# Altium PCB 模拟触发器.PCBDOC
Units mm, origin at the board's own origin, x right, y up, seen from the top; angles counter-clockwise.
Board outline 190.25 x 91.44 mm, 2 copper layers (Top Layer, Bottom Layer); 45 components, 36 nets, 174 pads, 5 vias.
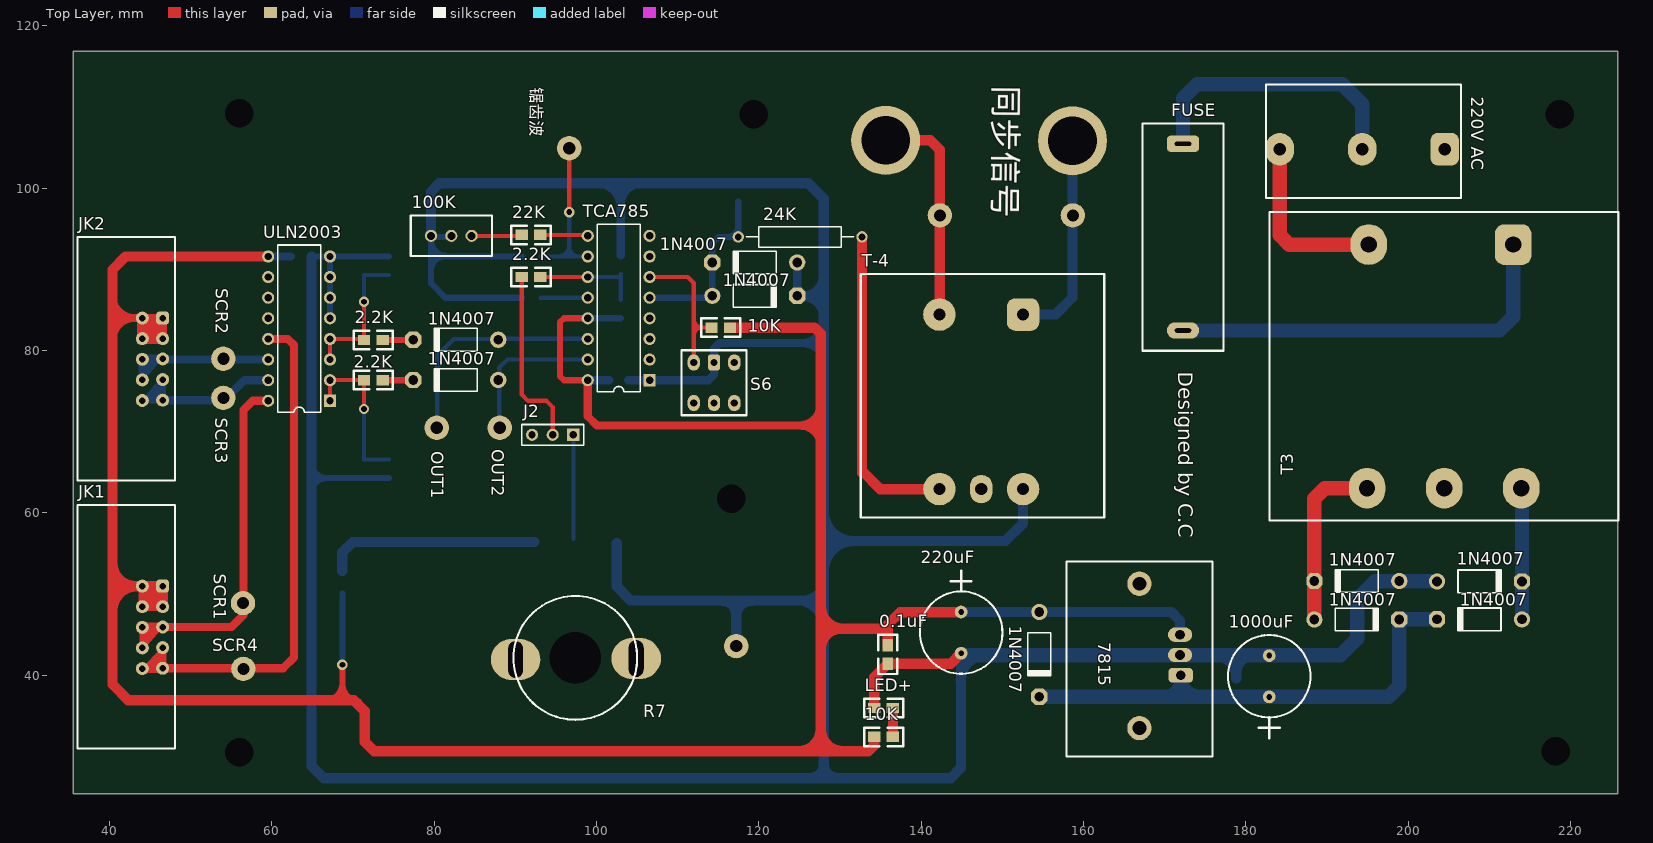
[diagram p0: Top Layer view]
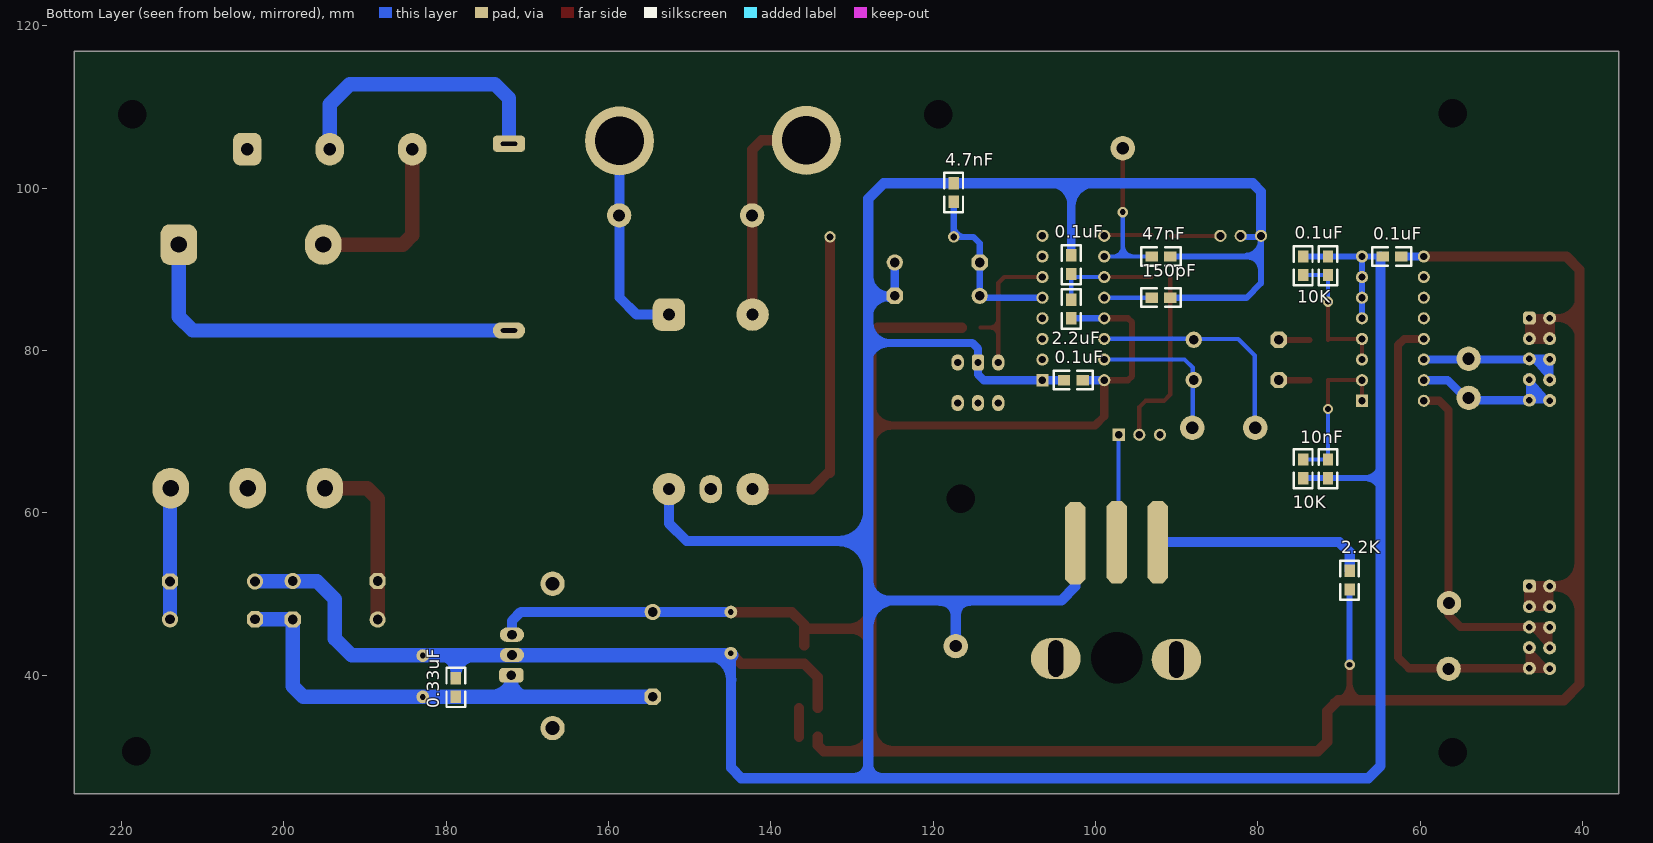
[diagram p1: Bottom Layer view, seen from below]

## Layer stack, top to bottom
Top Solder: solder mask 0.0102, Solder Resist, Dk 3.5
Top Layer: signal copper 0.0356
Dielectric1: dielectric 0.32, FR-4, Dk 4.8
Bottom Layer: signal copper 0.0356
Bottom Solder: solder mask 0.0102, Solder Resist, Dk 3.5

## Board outline
35.56,25.4 225.806,25.4 225.806,116.84 35.56,116.84

## Design rules (kind name [scope] priority, off if disabled: settings)
Clearance [All] p1: gap=0.254 ignorepadtopadclearanceinfootprint=FALSE except(0: Arc-Hole Track-Hole SMDPad-Hole THPad-Hole Via-Hole Fill-Hole Poly-Hole Region-Hole Text-Hole)
FabricationTestPointUsage TestPointUsage [All] p1: valid=0 allowmultiple=FALSE
FabricationTestpoint Testpoint [All] p1: side=3 testpointundercomponent=TRUE minsize=1.016 maxsize=2.54 preferedsize=1.524 minholesize=0 maxholesize=1.016 preferedholesize=0.813 testpointgrid=0.025 allowsidetop=TRUE allowsidebottom=TRUE usegrid=TRUE gridtolerance=0
Height [All] p1: minheight=0 maxheight=254 prefheight=12.7
HoleSize [All] p1: absolutevalues=TRUE maxlimit=25.4 minlimit=0.025 maxpercent=80.000 minpercent=20.000
PolygonConnect [All] p1: connectstyle=Relief reliefconductorwidth=0.254 reliefentries=4 polygonreliefangle="90 Angle" airgapwidth=0.254
RoutingVias [All] p1: holewidth=0.711 width=1.27 viastyle="Through Hole" minholewidth=0.711 minwidth=1.27 maxholewidth=0.711 maxwidth=1.27
SolderMaskExpansion [All] p1: expansion=0.102 istentingtop=FALSE
Width [All] p1: maxlimit=2.54 minlimit=0.254 preferedwidth=0.254 minimp=50.000000 maximp=50.000000 favimp=50.000000
26 further rules are at their usual default settings.

## Classes and differential pairs
component class Sheet3: 0.1uF 1N4007 2.2K 2.2uF 4.7nF 10K 22K 24K 47nF 100K 150pF 220uF J2 LED+ S1 T1 TCA785 ULN2003

## Components (designator, comment, footprint, x,y, rotation, side; value= is the part's Value field where it differs from the comment)
0.1uF "Cap" 0805 62.357,91.567 r0 bottom (schematic designator C1)
0.1uF "Cap" 0805 74.422,89.281 r90 bottom (schematic designator C6)
0.1uF "Cap" 0805 102.997,91.694 r270 bottom (schematic designator C3)
0.1uF "Cap" 0805 103.886,76.327 r180 bottom (schematic designator C6)
0.1uF "Cap" 0805 135.89,41.402 r90 top (schematic designator C9)
0.33uF "Cap" 0805 178.816,39.624 r270 bottom (schematic designator C12)
1N4007 "Diode 1N4001" DO-41 154.559,42.545 r270 top (schematic designator D12)
1N4007 "Diode 1N4004" DO-41 208.788,51.537 r0 top (schematic designator D8)
1N4007 "Diode 1N4004" DO-41 208.788,46.863 r180 top (schematic designator D7)
1N4007 "Diode 1N4004" DO-41 193.675,51.587 r180 top (schematic designator D8)
1N4007 "Diode 1N4004" DO-41 193.675,46.838 r0 top (schematic designator D8)
1N4007 "Diode 1N4004" DO-41 119.507,86.716 r0 top (schematic designator D8)
1N4007 "Diode 1N4004" DO-41 119.507,90.83 r180 top (schematic designator D8)
1N4007 "Diode 1N4004" DO-41 82.677,81.305 r180 top (schematic designator D8)
1N4007 "Diode 1N4004" DO-41 82.677,76.352 r180 top (schematic designator D8)
2.2K "Res1" 0805 68.707,52.832 r270 bottom (schematic designator R8)
2.2K "Res1" 0805 90.805,89.027 r0 top (schematic designator R4)
2.2K "Res1" 0805 71.374,76.327 r0 top (schematic designator R2)
2.2K "Res1" 0805 71.374,81.28 r0 top (schematic designator R3)
2.2uF "Cap" 0805 102.997,86.233 r270 bottom (schematic designator C2)
4.7nF "Cap" 0805 117.475,98.298 r90 bottom (schematic designator C1)
10K "Res1" 0805 74.422,64.262 r90 bottom (schematic designator R3)
10K "Res1" 0805 71.374,89.281 r90 bottom (schematic designator R1)
10K "Res1" 0805 114.173,82.804 r0 top (schematic designator R9)
10K "Res1" 0805 136.525,32.385 r180 top (schematic designator R10)
10nF "Cap" 0805 71.374,64.262 r90 bottom (schematic designator C6)
22K "Res1" 0805 90.805,94.234 r0 top (schematic designator R5)
24K "Res1" AXIAL-0.6 125.095,93.98 r0 top (schematic designator R1)
47nF "Cap" 0805 90.805,91.567 r0 bottom (schematic designator C4)
100K "RPot" 滑动变阻器 79.629,94.107 r0 top (schematic designator R6)
150pF "Cap" 0805 90.805,86.487 r0 bottom (schematic designator C5)
220uF "Cap Pol1" RB.2/.4 144.93,47.775 r90 top (schematic designator C10)
"220V AC" "Comment" KF950 206.502,112.776 r180 top
1000uF "Cap Pol1" RB.2/.4 182.88,37.315 r270 top (schematic designator C10)
7815 "L7815CV" SANRE-78XX-2 175.895,29.972 r90 top (schematic designator U13)
FUSE "Comment" FUSE-1 167.259,107.95 r270 top
J2 "CON3" HDR1X3 97.155,69.596 r180 top
JK1 "Comment" JIEKOU-5L53 36.068,60.96 r270 top
JK2 "Comment" JIEKOU-5L53 36.068,93.98 r270 top
LED+ "LED0" 0805 136.525,35.941 r180 top (schematic designator D10)
S6 "SW-SPST" KAIGUAN-1 118.491,80.01 r180 top
T3 "Trans Eq" T5-5W 225.933,97.028 r180 top
T-4 "Comment" T5-1W 162.56,89.408 r180 top
TCA785 "TCA785" DIP-16 102.743,85.217 r90 top (schematic designator U1)
ULN2003 "ULN2003A" DIP-16 63.373,82.677 r90 top (schematic designator U2)

## Footprints (in the part's own frame and the unit in brackets; to place one, negate y for a bottom-side part, rotate by r counter-clockwise, add the part's x,y. Pads: shape width x height; smd on the part's side, far side on the other; paste and mask are expansions set on the pad)
0805 [mil]
  rect 60x50 smd: 1(0,0) 2(90,0)
  silkscreen extent -50,-45 140,45
AXIAL-0.6 [mm] "Variable Resistor; 2 Leads"
  round 1.4 hole 0.85: 1(-7.62,0) 2(7.62,0)
  silkscreen extent -6.6,-1.27 6.6,1.27
DIP-16 [mm] "DIP; 16 Leads; Row Spacing 7.62 mm; Pitch 2.54 mm"
  rect 1.5x1.5 hole 0.9: 1(-8.89,-3.81)
  round 1.5 hole 0.9: 2(-6.35,-3.81) 3(-3.81,-3.81) 4(-1.27,-3.81) 5(1.27,-3.81) 6(3.81,-3.81) 7(6.35,-3.81) 8(8.89,-3.81) 9(8.89,3.81) 10(6.35,3.81) 11(3.81,3.81) 12(1.27,3.81) 13(-1.27,3.81) 14(-3.81,3.81) 15(-6.35,3.81) 16(-8.89,3.81)
  silkscreen extent -10.3,-2.65 10.3,2.65
DO-41 [mm] "Diode, Axial; Body 5.2 x 2.7 mm (LxDia. max), Lead Dia. 0.86 mm (max)"
  round 2 hole 1.2: 1(-5.23,0)
  oct 2x2 hole 1.2: 2(5.23,0)
  silkscreen extent -2.65,-1.4 2.75,1.4
FUSE-1 [mm]
  rrect50% 2x4 hole 0.5 slot 2 at 90 deg: 1(2.5,5)
  oval 2x4 hole 0.5 slot 2 at 90 deg: 2(25.5,5)
  silkscreen extent 0,0 28,10
HDR1X3 [mm] "Connector; Header; 3 Position"
  rect 1.5x1.5 hole 0.9: 1(0,0)
  round 1.5 hole 0.9: 2(2.54,0) 3(5.08,0)
  silkscreen extent -1.27,-1.27 6.35,1.27
JIEKOU-5L53 [mm]
  rrect50% 1.6x1.6 hole 0.8: 1(10,10.5)
  round 1.6 hole 0.8: 2(10,8) 3(12.54,10.5) 4(12.54,8) 5(15.04,10.5) 6(15.08,8) 7(17.58,10.5) 8(17.62,8) 9(20.12,10.5) 10(20.16,8)
  silkscreen extent 0,0 30,12
KAIGUAN-1 [mm]
  rrect50% 1.524x2 hole 0.9: 1(4,1.5)
  oval 1.5x2 hole 0.9: 2(6.5,1.5)
  oval 1.524x2 hole 0.9: ""(1.5,6.5) ""(1.5,1.5) ""(4,6.5) ""(6.5,6.5)
  silkscreen extent 0,0 8,8
KF950 [mm]
  rrect50% 3.5x4 hole 1.5: 1(2,8)
  oval 3.5x4 hole 1.5: 2(12.16,8) 3(22.32,8)
  silkscreen extent 0,0 24,14
RB.2/.4 [mil]
  round 62 hole 28: 1(0,0) 2(-200,0)
  silkscreen extent -300,-200 200,200
SANRE-78XX-2 [mm]
  rrect50% 1.778x3 hole 1.2: 1(10,3.92)
  oval 1.778x3 hole 1.2: 2(12.5,4) 3(15,4)
  round 3 hole 1.7: ""(3.5,9) ""(21.28,9)
  silkscreen extent 0,0 24,18
T5-1W [mm]
  rrect50% 4x4 hole 1.5: 1(10,5)
  round 4 hole 1.5: 2(20.305,5) 3(20.305,26.5) 4(10,26.5)
  oval 2.794x3.5 hole 1.5: ""(15.152,26.5)
  silkscreen extent 0,0 30,30
T5-5W [mm]
  rrect50% 4.5x5 hole 2: 1(13,4)
  oval 4.5x5 hole 2: 2(30.78,4) 3(31,34) 4(12,34) ""(21.5,34)
  silkscreen extent 0,0 43,38
滑动变阻器 [mm]
  round 1.5 hole 1: 1(0,0) 2(2.5,0) 3(5,0)
  silkscreen extent -2.5,-2.5 7.5,2.5

## Part data
0.1uF 0.1uF 0.1uF 0.1uF 0.1uF 0.33uF 2.2uF 4.7nF 10nF 47nF 150pF: "Capacitor"
1N4007 1N4007 1N4007 1N4007 1N4007 1N4007 1N4007 1N4007 1N4007: "1 Amp General Purpose Rectifier"
2.2K 2.2K 2.2K 2.2K 10K 10K 10K 10K 22K 24K: "Resistor"
100K: "Potentiometer"
220uF 1000uF: "Polarized Capacitor (Radial)"
7815: "Positive Voltage Regulator"
LED+: "Typical INFRARED GaAs LED"
S6: "Single-Pole, Single-Throw Switch"
T3: "Transformer (Equivalent Circuit Model)"
ULN2003: "High-Voltage, High-Current Darlington Array"

## Free pads (board coordinates)
  oct 2.54x10.16 smd far side: 1(92.329,56.388) 2(97.409,56.388) 3(102.489,56.261)
  round 3 hole 1.5: 5(54.051,74.143) 5(54.051,78.969) 5(56.464,48.87) 5(56.515,40.767) 5(80.34,70.46) 5(88.087,70.46) 5(96.647,104.902) 5(117.221,43.561) 5(142.316,96.622) 5(158.699,96.622)
  round 0 hole 3.5: 10(56.007,30.48) 10(56.007,109.22) 10(116.586,61.722) 10(119.38,109.093) 10(218.186,30.607) 10(218.694,109.093)
  round 8.5 hole 6: 11(135.636,105.867) 12(158.648,105.816)
  round 0 hole 6.35: " "(97.407,42.115)
  oval 6.096x5.08 hole 1.8 slot 4.5 at 90 deg: ""(90.043,41.91) ""(104.902,42.037)

## Via types
v1: diameter 1.27, hole 0.711, Top Layer to Bottom Layer, 5 vias

## Nets (pads, with @x,y where several pads share a name; then routed paths per layer and width w, separated by ;. In a path a pad name is that pad's centre, name@x,y a point inside that pad or via, vN(x,y) a via of type N, cw(c..) or ccw(c..) an arc to the next point about the centre after c; other vN are vias at no path point)
+15V: 0.1uF.1@62.357,91.567 0.1uF.2@101.6,76.327 0.1uF.2@135.89,43.688 1N4007.1@154.559,47.775 2.2K.2@68.707,50.546 2.2uF.2 10K.2@116.459,82.804 10K.2@134.239,32.385 220uF.1 7815.3 JK1.1 JK1.2 JK1.3 JK1.4 JK2.1 JK2.2 JK2.3 JK2.4 TCA785.13 TCA785.16 ULN2003.9 | length 410.2
  Top Layer w0.762: 66.552,36.767 ccw(c66.425,39.053) 68.707,38.862 ; 68.707,37.338 v1(68.707,41.275) ; 68.707,38.735 ccw(c70.929,38.925) 70.739,36.703 ; TCA785.16 96.012,76.327 95.504,76.835 95.504,83.439 96.012,83.947 v1(98.933,83.947)
  Top Layer w1.016: 40.386,81.026 cw(c43.07,81.297) 40.386,81.567 cw(c43.07,81.297) 42.799,83.98 ; 40.386,86.995 ccw(c43.1,86.694) 40.386,86.393 ccw(c43.1,86.694) 42.799,83.98 ; 40.419,83.98 42.799,83.98 ; JK2.2 42.799,83.98 ; TCA785.16 98.933,71.882 100.076,70.739 125.095,70.739 ; 127.635,68.199 ccw(c125.095,68.199) 125.095,70.739 ; 127.635,70.739 125.095,70.739 ; 127.635,73.279 cw(c124.968,73.406) 125.095,70.739
  Top Layer w1.27: 40.386,47.879 cw(c43.451,47.895) JK1.2@43.434,50.96 ; 40.386,53.721 ccw(c43.227,53.801) JK1.2@43.307,50.96 ; 40.419,50.96 JK1.2 ; ULN2003.9 42.037,91.567 40.386,89.916 40.386,38.862 42.332,36.916 70.104,36.916 71.468,35.552 71.468,31.783 72.644,30.607 133.35,30.607 ; 10K.2@116.459,82.804 126.873,82.804 127.635,82.042 127.635,30.607 ; 124.841,30.607 ccw(c124.841,33.401) 127.635,33.397 ; 127.635,43.18 cw(c130.175,43.18) 127.635,43.184 cw(c130.175,43.18) 130.175,45.72 ; 127.635,45.72 135.89,45.72 ; 127.635,48.514 ccw(c130.429,48.514) 130.429,45.72 ; 130.429,30.607 cw(c130.429,33.401) 127.635,33.398 ; 133.477,30.607 134.239,31.369 10K.2@134.239,32.385 ; 0.1uF.2@135.89,43.688 135.89,46.228 137.414,47.752 220uF.1@144.907,47.752 ; 127.635,33.398 ccw(c124.841,33.401) 127.635,33.401 ccw(c130.429,33.401) 127.635,33.398
  Bottom Layer w0.762: v1@68.707,41.529 2.2K.2@68.707,50.038 ; v1(98.933,83.947) 2.2uF.2
  Bottom Layer w1.016: ULN2003.9 0.1uF.1@62.357,91.567 ; TCA785.16 0.1uF.2@101.6,76.327
  Bottom Layer w1.27: 220uF.1 170.792,47.775 171.895,46.672 7815.3
CON3-1: J2.1 pad.2 | length 12.8
  Bottom Layer w0.508: pad.2@97.155,56.769 J2.1
CON3-2: 2.2K.1@90.805,89.027 J2.2 | length 22.3
  Top Layer w0.508: 2.2K.1@90.805,89.027 90.805,74.549 91.567,73.787 93.853,73.787 94.615,73.025 J2.2
CON3-3: J2.3
GND: 0.1uF.1@102.997,91.694 0.1uF.1@103.886,76.327 0.1uF.1@135.89,41.402 0.1uF.2@64.643,91.567 0.1uF.2@74.422,91.567 0.33uF.1 1N4007.1@124.737,90.83 1N4007.1@198.905,51.587 1N4007.1@203.558,51.537 1N4007.2@124.737,86.716 4.7nF.2 10K.1@74.422,64.262 10K.2@71.374,91.567 10nF.1 47nF.1 100K.1 100K.2 150pF.1 220uF.2 1000uF.2 7815.2 LED+.2 pad.3 pad.5@117.221,43.561 S6.1 T-4.4 TCA785.1 ULN2003.5 ULN2003.6 ULN2003.7 ULN2003.8 | length 615.6
  Top Layer w1.27: LED+.2 134.239,39.751 135.89,41.402 143.637,41.402 220uF.2@144.907,42.672
  Bottom Layer w0.254: TCA785.1@106.426,76.454 TCA785.1
  Bottom Layer w0.762: 0.1uF.2@64.643,91.567 0.1uF.2@74.422,91.567 ; 64.897,62.484 cw(c66.739,62.42) 66.675,64.262 cw(c66.739,62.42) 66.737,64.263 ; 64.897,64.262 10K.1@74.422,64.262 ; 64.897,66.167 ccw(c66.802,66.167) 66.737,64.263 ; ULN2003.5 ULN2003.8 ; 79.629,90.043 cw(c81.3,89.896) 81.153,91.567 ; 100K.1@79.629,93.472 ccw(c81.49,93.515) 81.334,91.66 ; 100K.1@79.629,93.98 100K.2@82.002,93.98 ; 100K.1 79.629,88.265 81.407,86.487 150pF.1 ; 79.756,91.567 47nF.1 ; 66.737,64.263 ccw(c66.802,66.167) 66.802,64.262 ccw(c66.739,62.42) 66.737,64.263
  Bottom Layer w1.016: 99.949,100.584 cw(c100.013,97.599) 100.076,100.584 cw(c100.013,97.599) 102.987,97.852 ; 0.1uF.1@102.997,91.694 102.997,97.663 ; 102.997,100.584 102.997,97.663 ; 0.1uF.1@103.886,76.327 113.792,76.327 114.491,77.026 114.491,80.201 115.189,80.899 125.222,80.899 ; 105.443,100.584 ccw(c105.68,97.901) 102.997,98.138 ccw(c105.68,97.901) 102.987,97.852 ; 1N4007.1@124.737,90.805 124.737,86.614 128.016,86.614 ; 1N4007.2@125.476,86.614 cw(c125.285,83.883) 128.016,84.074 ; 125.603,80.899 cw(c125.412,78.168) 128.016,79.013 cw(c125.412,78.168) 128.143,78.359 ; 127.889,83.439 cw(c125.286,83.502) 125.349,80.899 128.016,80.899 ; 102.987,97.852 cw(c100.013,97.599) 102.997,97.663 ; 102.987,97.852 ccw(c105.68,97.901) 102.997,97.663
  Bottom Layer w1.27: 64.897,28.829 66.421,27.305 143.637,27.305 144.907,28.575 220uF.2@144.907,42.672 ; 64.897,28.956 0.1uF.2@64.897,91.567 ; 100K.1 79.629,99.568 80.645,100.584 99.949,100.584 ; 100.076,100.584 126.111,100.584 128.016,98.679 128.016,27.305 ; pad.3 102.489,50.927 104.238,49.178 128.016,49.178 ; 115.57,49.149 cw(c115.506,47.434) 117.221,47.371 cw(c119.062,47.307) 119.126,49.149 ; pad.5@117.221,43.561 117.221,49.149 ; 125.401,49.178 cw(c124.587,45.847) 128.016,45.847 ; 125.476,49.178 ccw(c125.49,51.703) 125.505,49.178 ccw(c125.49,51.703) 128.016,51.689 ; 1N4007.2@125.476,86.614 ccw(c125.413,89.217) 128.016,89.154 ; 126.492,27.305 ccw(c126.301,29.019) 128.016,28.829 ; 128.016,28.956 ccw(c129.794,29.083) 129.667,27.305 ; 128.016,52.832 cw(c131.699,52.832) 131.635,56.514 ; 128.016,60.071 ccw(c131.636,60.134) 131.572,56.515 ccw(c131.636,60.134) 131.635,56.514 ; 128.143,56.515 150.368,56.515 152.56,58.707 T-4.4 ; 144.907,39.243 cw(c147.892,39.434) 144.907,39.624 cw(c147.892,39.434) 147.701,42.418 ; 176.022,42.291 cw(c176.347,39.839) 0.33uF.1@178.799,40.165 ; 0.33uF.1 178.816,42.418 ; 0.33uF.1@178.816,39.751 cw(c181.268,40.076) 180.942,42.528 ; 131.635,56.514 cw(c131.699,52.832) 131.699,56.515 cw(c131.636,60.134) 131.635,56.514
  Bottom Layer w1.778: 220uF.2@144.907,42.418 191.643,42.418 193.7,44.475 193.7,49.327 195.91,51.537 1N4007.1@203.558,51.537
L1: "220V AC.3" T3.2 | length 22
  Top Layer w1.778: 184.182,104.776 184.182,94.202 185.356,93.028 T3.2
L2: 
L3: "220V AC.2" FUSE.1 | length 34.8
  Bottom Layer w1.778: FUSE.1 172.259,111.045 173.99,112.776 191.77,112.776 ; 191.897,112.776 194.342,110.331 194.342,104.776
L4: FUSE.2 T3.1 | length 50.3
  Bottom Layer w1.778: FUSE.2 211.228,82.45 212.933,84.155 T3.1
Net8_1: 
Net9_2: 1N4007.1@188.445,46.838 1N4007.2@188.445,51.587 T3.3 | length 21.9
  Top Layer w1.778: 1N4007.1@188.42,46.888 188.42,61.71 189.738,63.028 T3.3
NetC1_1: 1N4007.1@114.277,86.716 1N4007.2@114.277,90.83 4.7nF.1 24K.1 TCA785.5 | length 23.9
  Top Layer w0.254: 1N4007.1@114.15,86.487 1N4007.1@114.277,86.614
  Bottom Layer w0.762: TCA785.5 1N4007.1@114.15,86.487 ; 1N4007.1@114.277,86.614 114.277,93.195 115.062,93.98 24K.1 117.475,95.885 4.7nF.1 ; 116.332,93.98 ccw(c116.141,95.313) 117.475,95.123
NetC2_1: 0.1uF.2@102.997,89.408 2.2K.2@93.091,89.027 2.2uF.1 TCA785.11 | length 12.7
  Top Layer w0.508: 2.2K.2@93.091,89.027 TCA785.11
  Bottom Layer w0.508: TCA785.11 0.1uF.2@102.616,89.027 ; 2.2uF.1 0.1uF.2@102.997,89.408
NetC4_2: 47nF.2 pad.5@96.647,104.902 TCA785.10 | length 23.3
  Top Layer w0.508: v1(96.647,97.028) pad.5@96.647,104.902
  Bottom Layer w0.508: 47nF.2 TCA785.10 ; 95.377,91.567 ccw(c95.25,92.964) 96.629,92.705 ; 96.647,91.694 96.647,93.091 ; v1(96.647,97.028) 96.647,93.091 ; 97.663,91.567 cw(c97.917,92.837) 96.647,92.583 cw(c97.917,92.837) 96.629,92.705 ; 96.629,92.705 cw(c97.917,92.837) 96.647,93.091 ; 96.629,92.705 ccw(c95.25,92.964) 96.647,92.837 ccw(c95.25,92.964) 96.647,93.091
NetC5_2: 150pF.2 TCA785.12 | length 5.8
  Bottom Layer w0.508: 150pF.2 TCA785.12
NetD3_2: 1N4007.2@77.447,76.352 2.2K.2@73.66,76.327 | length 3.9
  Top Layer w0.762: 2.2K.2@73.66,76.327 1N4007.2@77.574,76.327
NetD4_1: 1N4007.1@87.907,81.305 pad.5@80.34,70.46 TCA785.14 | length 28.1
  Bottom Layer w0.508: pad.5@80.391,70.612 80.391,79.375 82.423,81.407 1N4007.1@88.034,81.407 ; 1N4007.1@88.034,81.43 TCA785.14@98.91,81.43
NetD4_2: 1N4007.2@77.447,81.305 2.2K.2@73.66,81.28 | length 3.8
  Top Layer w0.762: 2.2K.2@73.66,81.28 1N4007.2@77.447,81.28
NetD10_1: 10K.1@136.525,32.385 LED+.1 | length 3.6
  Top Layer w1.27: 10K.1@136.525,32.385 LED+.1
NetR1_2: 24K.2 T-4.3 | length 39.9
  Top Layer w1.27: 132.715,64.897 24K.2 ; 132.715,65.151 134.958,62.908 T-4.3@142.56,62.908
NetR2_1: 2.2K.1@71.374,76.327 10K.2@74.422,66.548 10nF.2 ULN2003.1 ULN2003.2 | length 19.6
  Top Layer w0.508: ULN2003.1 ULN2003.2 71.374,76.327 v1(71.374,72.771)
  Bottom Layer w0.508: v1(71.374,72.771) 10nF.2 10K.2@74.422,66.548
NetR3_1: 0.1uF.1@74.422,89.281 2.2K.1@71.374,81.28 10K.1@71.374,89.281 ULN2003.3 ULN2003.4 | length 17.7
  Top Layer w0.508: ULN2003.3 ULN2003.4 2.2K.1@71.247,81.407 ; 2.2K.1@71.374,81.28 v1(71.374,85.979)
  Bottom Layer w0.508: v1(71.374,85.979) 71.374,89.281 0.1uF.1@74.422,89.281
NetR5_1: 22K.1 100K.3 | length 6
  Top Layer w0.508: 100K.3 22K.1@90.678,94.107
NetR5_2: 22K.2 TCA785.9 | length 6.3
  Top Layer w0.508: 22K.2 TCA785.9@98.806,94.234
  Bottom Layer w0.254: TCA785.9@98.552,94.488 TCA785.9
NetR7_1: 2.2K.1@68.707,52.832 pad.1 | length 26.4
  Bottom Layer w1.27: 2.2K.1@68.707,52.832 68.707,55.118 69.977,56.388 pad.1
NetR9_1: 10K.1@114.173,82.804 S6.2 TCA785.6 | length 20.8
  Top Layer w0.508: TCA785.6 111.252,89.027 111.991,88.288 111.991,84.709 S6.2 ; 111.991,81.788 cw(c112.955,81.84) 112.903,82.804 ; 111.991,82.804 10K.1@114.173,82.804 ; 111.991,83.82 ccw(c113.018,83.832) 113.03,82.804
S8_1: pad.5@142.316,96.622 pad.11 T-4.2 | length 27.7
  Top Layer w1.27: pad.11@135.382,105.867 141.148,105.867 142.306,104.709 T-4.2@142.306,84.408
S8_2: 1N4007.1@214.018,46.863 1N4007.2@214.018,51.537 T3.4 | length 16.2
  Bottom Layer w1.27: 1N4007.1@214.018,46.936 1N4007.1@214.091,46.863
  Bottom Layer w1.778: 1N4007.1@214.018,46.936 T3.4@214.018,63.028
S8_3: 0.33uF.2 1N4007.2@154.559,37.315 1N4007.2@198.905,46.838 1N4007.2@203.558,46.863 1000uF.1 7815.1 | length 67.8
  Bottom Layer w1.27: 169.164,37.338 ccw(c169.443,39.87) 7815.1@171.975,39.591 ; 7815.1@171.975,39.718 ccw(c174.427,40.044) 174.752,37.592
  Bottom Layer w1.778: 1N4007.2@154.559,37.315 197.589,37.315 198.88,38.606 1N4007.2@198.88,46.888 ; 171.975,37.315 7815.1@171.975,39.618 ; 1N4007.2@198.755,46.713 198.905,46.863 1N4007.2@203.177,46.863
S8_4: 
S8_5: pad.5@158.699,96.622 pad.12 T-4.1 | length 26.3
  Bottom Layer w1.27: T-4.1 156.544,84.408 158.648,86.512 pad.12
SCR1: JK1.5 JK1.6 JK1.8 pad.5@56.464,48.87 ULN2003.16 | length 39.3
  Top Layer w1.016: JK1.5 55.064,45.92 56.515,47.371 56.515,72.644 57.658,73.787 ULN2003.16
SCR2: JK2.5 JK2.6 JK2.8 pad.5@54.051,78.969 ULN2003.14 | length 13.2
  Bottom Layer w1.016: JK2.5@46.355,78.867 ULN2003.14
SCR3: JK2.7 JK2.9 JK2.10 pad.5@54.051,74.143 ULN2003.15 | length 14
  Bottom Layer w1.016: JK2.9 54.175,73.86 56.642,76.327 ULN2003.15
SCR4: JK1.7 JK1.9 JK1.10 pad.5@56.515,40.767 ULN2003.13 | length 58.7
  Top Layer w1.016: JK1.9 61.414,40.84 62.738,42.164 62.738,80.645 61.976,81.407 ULN2003.13
T15: 1N4007.1@87.907,76.352 pad.5@88.087,70.46 TCA785.15 | length 18.4
  Bottom Layer w0.508: pad.5@88.034,70.762 88.034,77.874 89.027,78.867 TCA785.15
pads on no net: 7815. "220V AC.1" S6. T3. T-4. TCA785.2 TCA785.3 TCA785.4 TCA785.7 TCA785.8 ULN2003.10 ULN2003.11 ULN2003.12

## Other copper
Top Layer:
  rectangle net +15V: 43.561,47.879 47.244,51.562
  rectangle net +15V: 43.434,80.772 47.117,84.455
  region net SCR4: 46.863,43.942 46.99,43.815 46.99,40.259 43.561,40.259
  region net SCR1: 47.053,46.419 43.752,46.419 43.752,42.862 43.878,42.735
Bottom Layer:
  region net SCR3: 43.624,73.469 46.926,73.469 46.926,77.025 46.799,77.153
  region net SCR2: 46.926,79.438 43.624,79.438 43.624,75.882 43.752,75.755

## Silkscreen, mask and mechanical layers (free items; w line width, h text height)
Top Overlay:
  circle w0.254: c97.407,42.115 r7.62
  text "同步信号" at 148.082,112.649 h5.08 r269.52
  text "锯齿波" at 91.44,112.395 h2.54 r270
  text "SCR2" at 53.086,87.63 h1.52 r270
  text "Designed by C.C" at 171.069,77.343 h3.05 r270
  text "SCR3" at 53.061,71.704 h1.52 r270
  text "OUT2" at 87.122,67.818 h1.52 r270
  text "OUT1" at 79.629,67.564 h1.52 r270
  text "SCR1" at 52.832,52.451 h1.52 r270
  text "SCR4" at 52.705,42.926 h1.52
  text "R7" at 105.791,34.798 h1.52
Mechanical 1:
  the board outline again, w0.508